# Altium PCB djb_v2_jig_b.PcbDoc
Units mm, origin at the board's own origin, x right, y up, seen from the top; angles counter-clockwise.
Board outline 37 x 33.95 mm, 2 copper layers (Top Layer, Bottom Layer), stack 1.569 mm thick; 12 components, 6 nets, 12 pads, 0 vias.
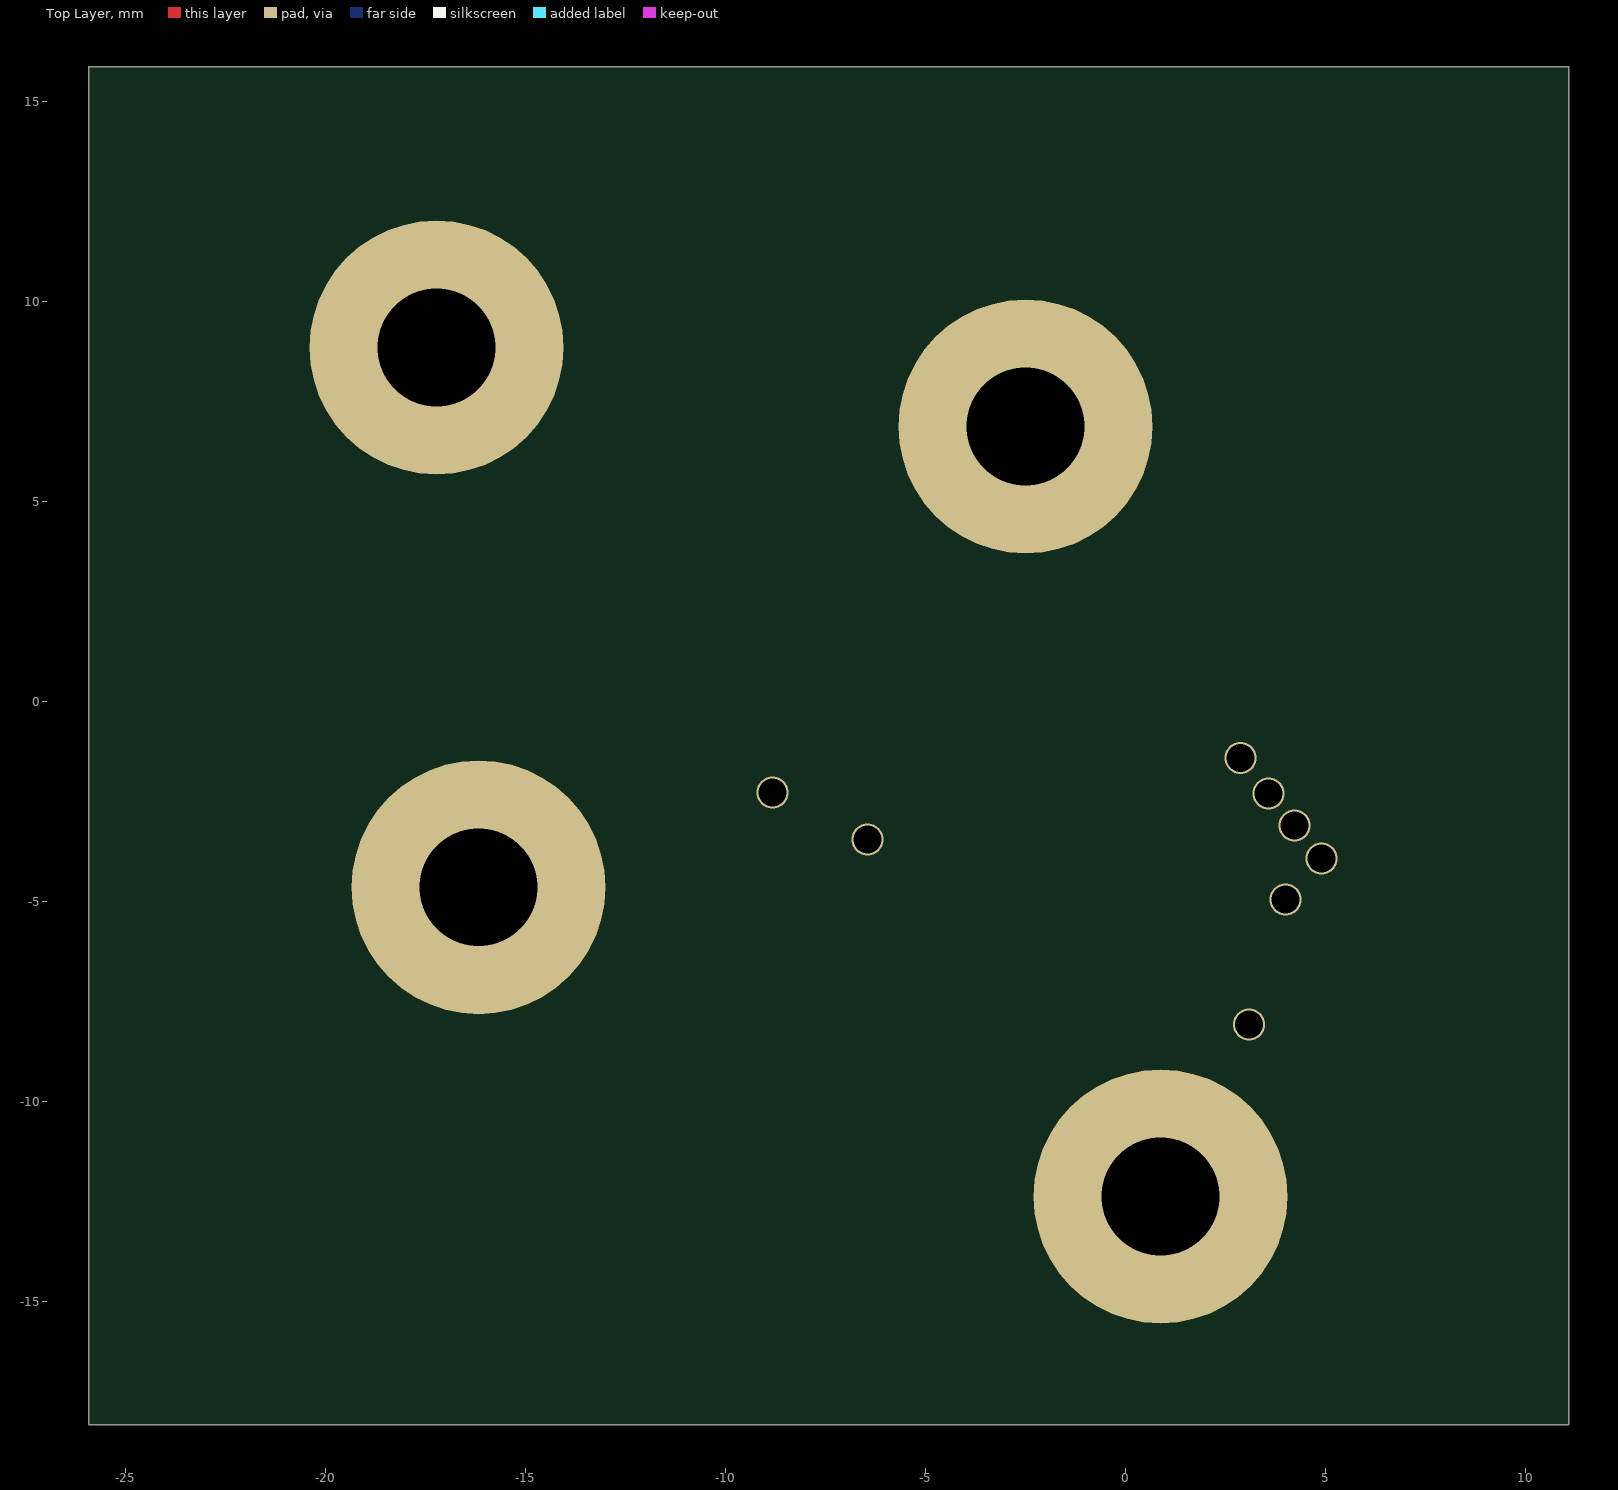
[diagram p0: Top Layer view]
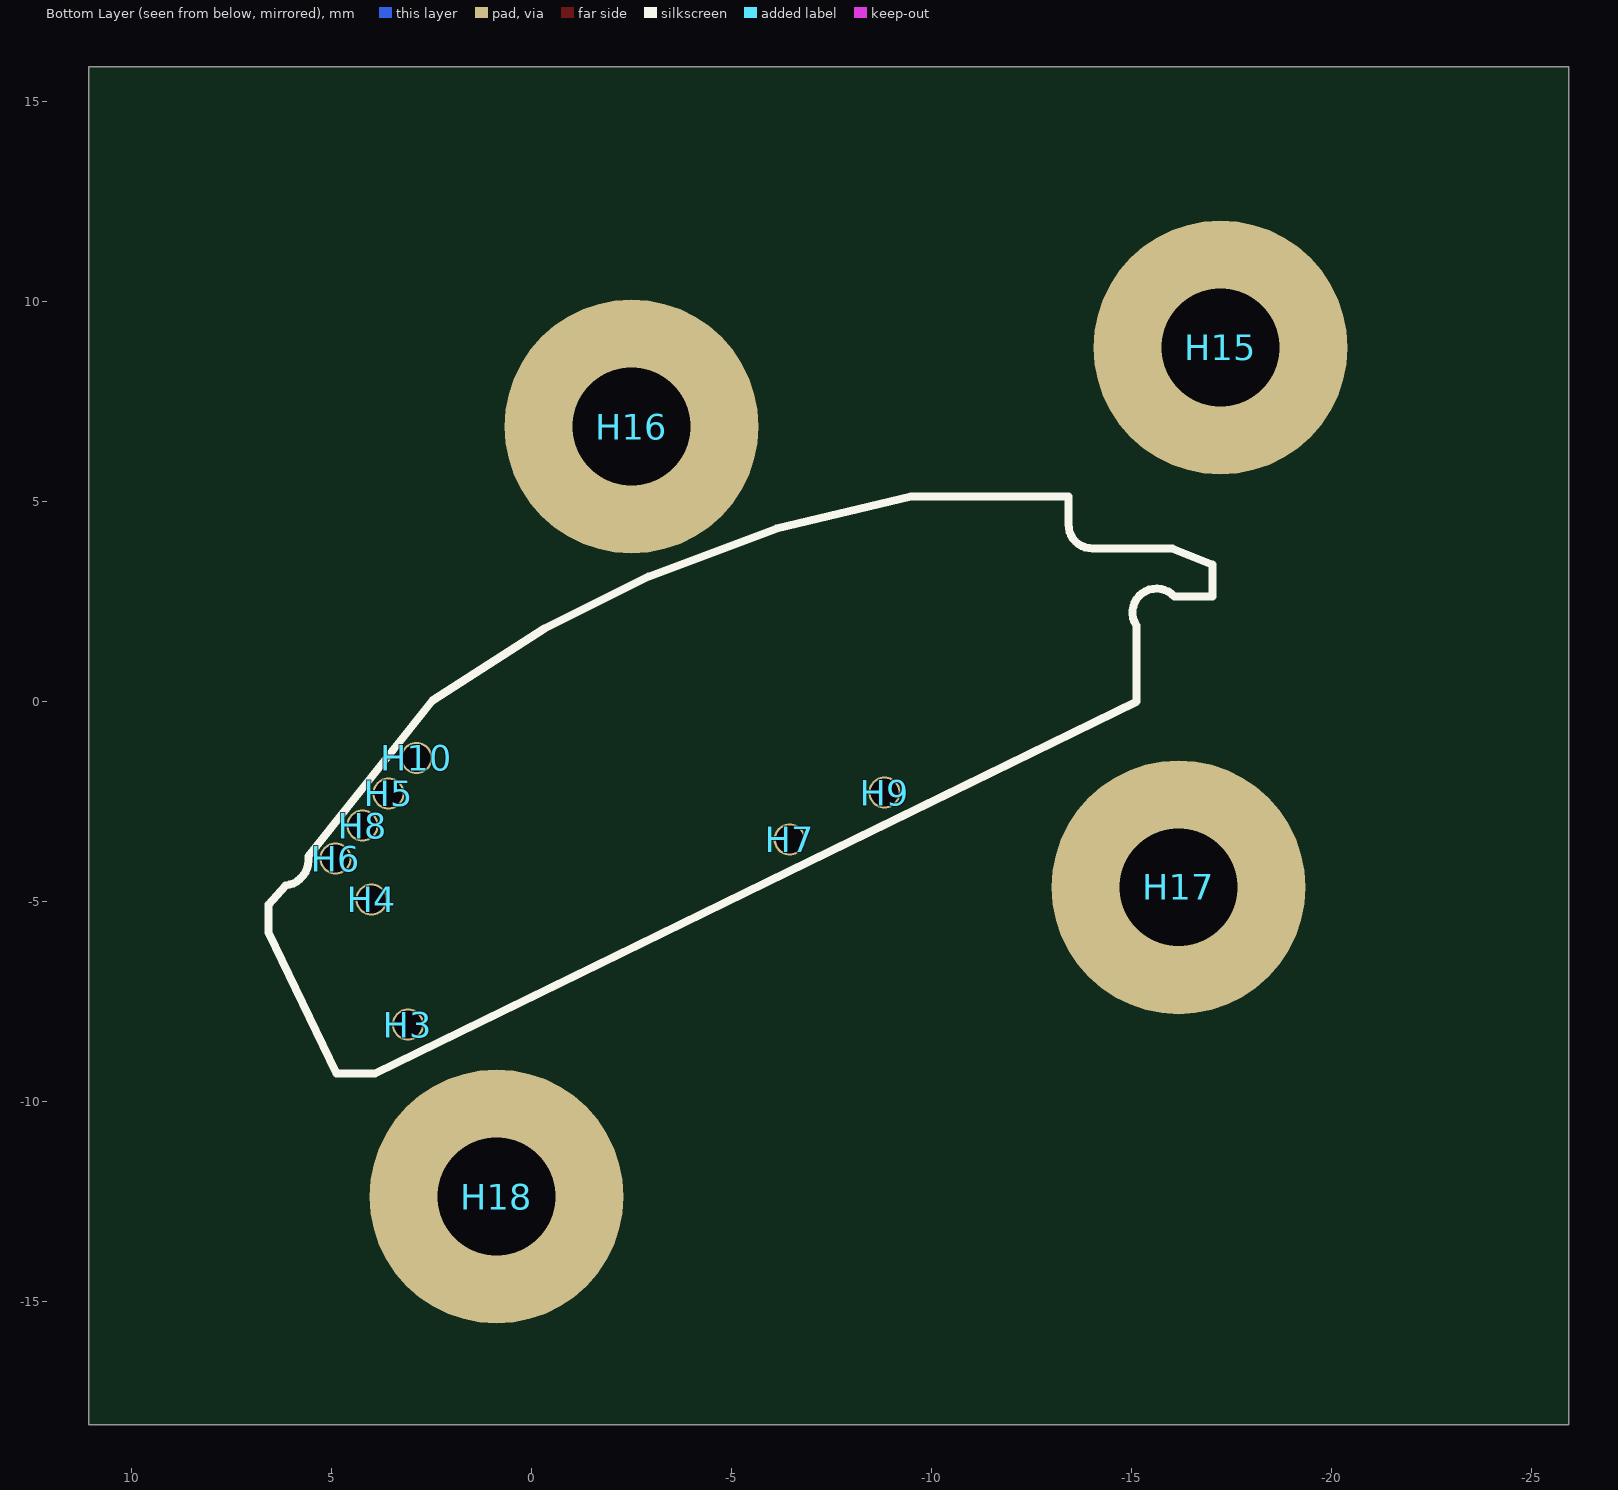
[diagram p1: Bottom Layer view, seen from below]

## Layer stack, top to bottom
Top Solder: solder mask 0.0254, SM-001, Dk 4
Top Layer: signal copper 0.035
Dielectric 1: core 1.4986, Core-043, Dk 4.3
Bottom Layer: signal copper 0.035
Bottom Solder: solder mask 0.0254, SM-001, Dk 4

## Board outline
11.075,-18.075 11.075,15.875 -25.925,15.875 -25.925,-18.075

## Design rules (kind name [scope] priority, off if disabled: settings)
Clearance [All] p1: gap=0.178 ignorepadtopadclearanceinfootprint=FALSE
ComponentClearance [All] p1: gap=0.025 collisioncheckmode=3 verticalgap=0.025 showdistances=TRUE
HoleSize [All] p1: absolutevalues=TRUE maxlimit=5.08 minlimit=0.254 maxpercent=80.000 minpercent=20.000
MinimumSolderMaskSliver [All] p1: minsoldermaskwidth=0.127
PolygonConnect [All] p1: connectstyle=Relief reliefconductorwidth=0.254 reliefentries=4 polygonreliefangle="90 Angle" airgapwidth=0.254
RoutingVias [All] p1: holewidth=0.51 width=0.8 viastyle="Through Hole" minholewidth=0.51 minwidth=0.8 maxholewidth=0.51 maxwidth=0.8
SilkToSilkClearance [All] p1: silktosilkclearance=0
SilkToSolderMaskClearance [IsPad] p1: minsilkscreentomaskgap=0 clearancetoexposedcopper=TRUE
SolderMaskExpansion [All] p1: expansion=0.102 istentingtop=FALSE
Width [All] p1: maxlimit=1.27 minlimit=0.254 preferedwidth=0.254 minimp=50.000000 maximp=50.000000 favimp=50.000000
25 further rules are at their usual default settings.

## Classes and differential pairs
component class djb_v2_jig: H15 H16 H17 H18

## Components (designator, comment, footprint, x,y, rotation, side; value= is the part's Value field where it differs from the comment)
H3 "SMITHS_S-00-U-1.3-G_MID" SMITHS_S-00-U-1.3-G_MID 3.088,-8.075 r180 bottom
H4 "SMITHS_S-00-U-1.3-G_MID" SMITHS_S-00-U-1.3-G_MID 4,-4.95 r180 bottom
H5 "SMITHS_S-00-U-1.3-G_MID" SMITHS_S-00-U-1.3-G_MID 3.575,-2.3 r180 bottom
H6 "SMITHS_S-00-U-1.3-G_MID" SMITHS_S-00-U-1.3-G_MID 4.9,-3.925 r180 bottom
H7 "SMITHS_S-00-U-1.3-G_MID" SMITHS_S-00-U-1.3-G_MID -6.451,-3.45 r180 bottom
H8 "SMITHS_S-00-U-1.3-G_MID" SMITHS_S-00-U-1.3-G_MID 4.225,-3.1 r180 bottom
H9 "SMITHS_S-00-U-1.3-G_MID" SMITHS_S-00-U-1.3-G_MID -8.825,-2.275 r180 bottom
H10 "SMITHS_S-00-U-1.3-G_MID" SMITHS_S-00-U-1.3-G_MID 2.875,-1.411 r90 bottom
H15 "4-40" SCREW_4-40_BLANK -17.225,8.85 r180 bottom
H16 "4-40" SCREW_4-40_BLANK -2.5,6.875 r180 bottom
H17 "4-40" SCREW_4-40_BLANK -16.175,-4.645 r180 bottom
H18 "4-40" SCREW_4-40_BLANK 0.875,-12.375 r180 bottom

## Footprints (in the part's own frame and the unit in brackets; to place one, negate y for a bottom-side part, rotate by r counter-clockwise, add the part's x,y. Pads: shape width x height; smd on the part's side, far side on the other; paste and mask are expansions set on the pad)
SCREW_4-40_BLANK [mil] "Hole for 4-40 screw"
  round 250 hole 116 paste-39370.1 mask-39370.1: 0(0,0)
  body extent -4,96 4,104, height 0
SMITHS_S-00-U-1.3-G_MID [mm] "Smiths Interconnect / IDI S-00-U-1.3-G Pogo Pin, Mid Mount"
  round 0.8 hole 0.69: 1(0,0)
  body extent -0.02,0.36 0.02,0.4, height 0.01

## Part data
H3 H4 H5 H6 H7 H8 H9 H10: "Smiths Interconnect / IDI S-00-U-1.3-G Pogo Pin 0.99mm Centers 16.7mm Long 2.8mm Travel, Mid Mount"
H15 H16 H17 H18: library part SCREW_4-40_EMPTY

## Nets (pads, with @x,y where several pads share a name; then routed paths per layer and width w, separated by ;. In a path a pad name is that pad's centre, name@x,y a point inside that pad or via, vN(x,y) a via of type N, cw(c..) or ccw(c..) an arc to the next point about the centre after c; other vN are vias at no path point)
+3V7: 
GND: 
TCK: 
TDI: 
TDO: 
TMS: 
pads on no net: H3.1 H4.1 H5.1 H6.1 H7.1 H8.1 H9.1 H10.1 H15.0 H16.0 H17.0 H18.0

## Silkscreen, mask and mechanical layers (free items; w line width, h text height)
Bottom Overlay:
  lines w0.2: -16.073,2.624 cw(c-15.625,2.225) -15.122,1.898 ; -16.073,2.625 -17.025,2.625 -17.025,3.425 -16.025,3.825 -14.025,3.825 ccw(c-14.025,4.425) -13.425,4.425 ; -15.125,1.9 -15.125,-0.005 3.911,-9.302 4.875,-9.3 6.575,-5.775 6.575,-5.075 6.15,-4.6 cw(c6.228,-3.95) 5.578,-3.872 2.475,0.025 -0.325,1.825 -2.925,3.125 -6.125,4.325 -9.485,5.125 -13.425,5.125 -13.425,4.425 ; -13.425,4.425 -13.425,4.425
Mechanical 3:
  the board outline again, w0.2